# Altium PCB PCB1.PcbDoc
Units mm, origin at the board's own origin, x right, y up, seen from the top; angles counter-clockwise.
Board outline 93.98 x 95.88 mm, 2 copper layers (Top Layer, Bottom Layer); 10 components, 13 nets, 72 pads, 8 vias.
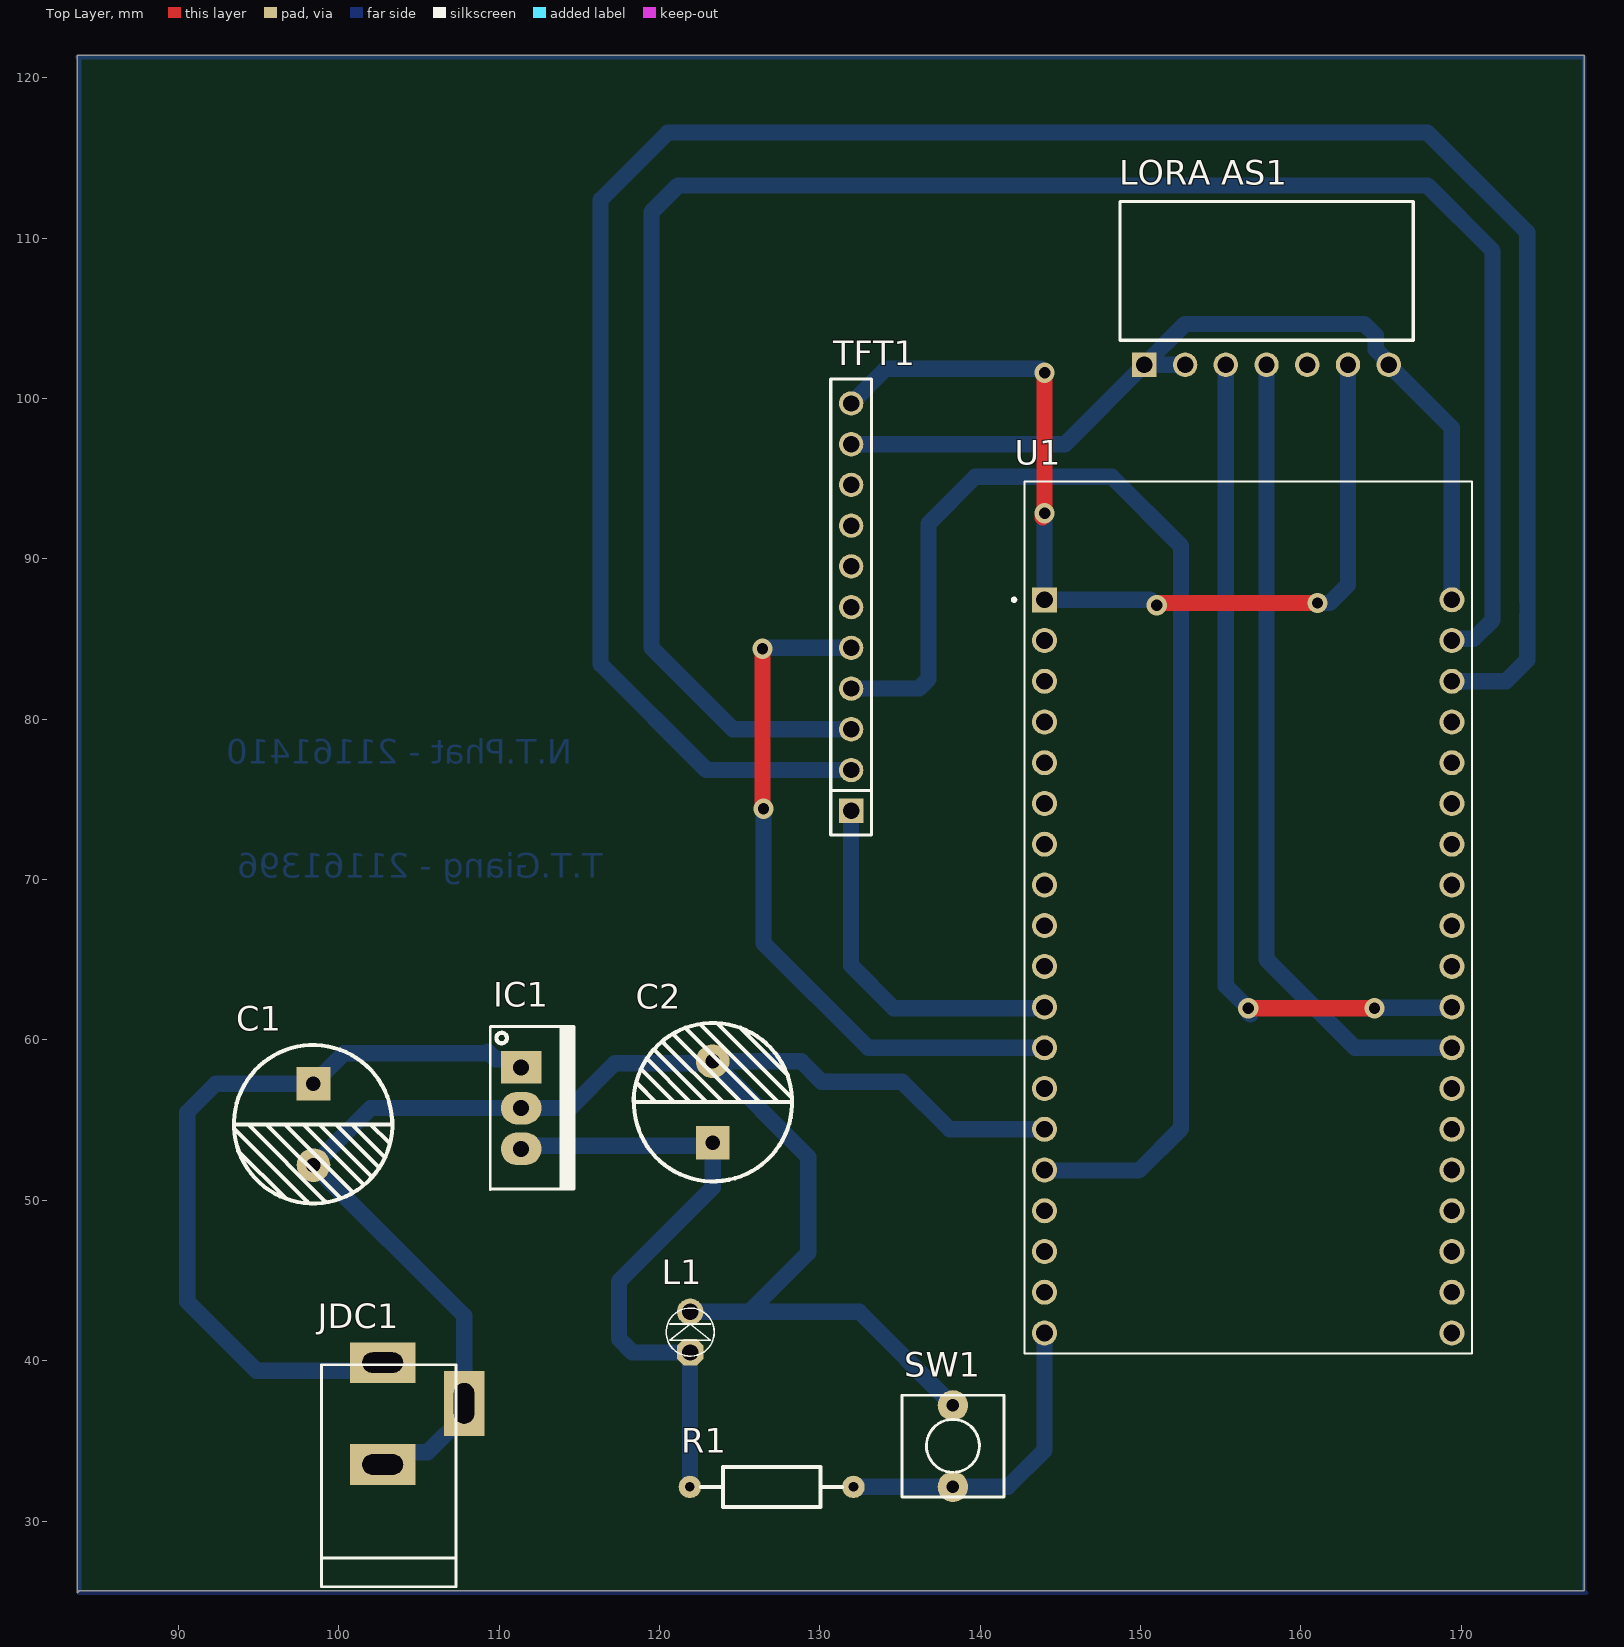
[diagram p0: Top Layer view]
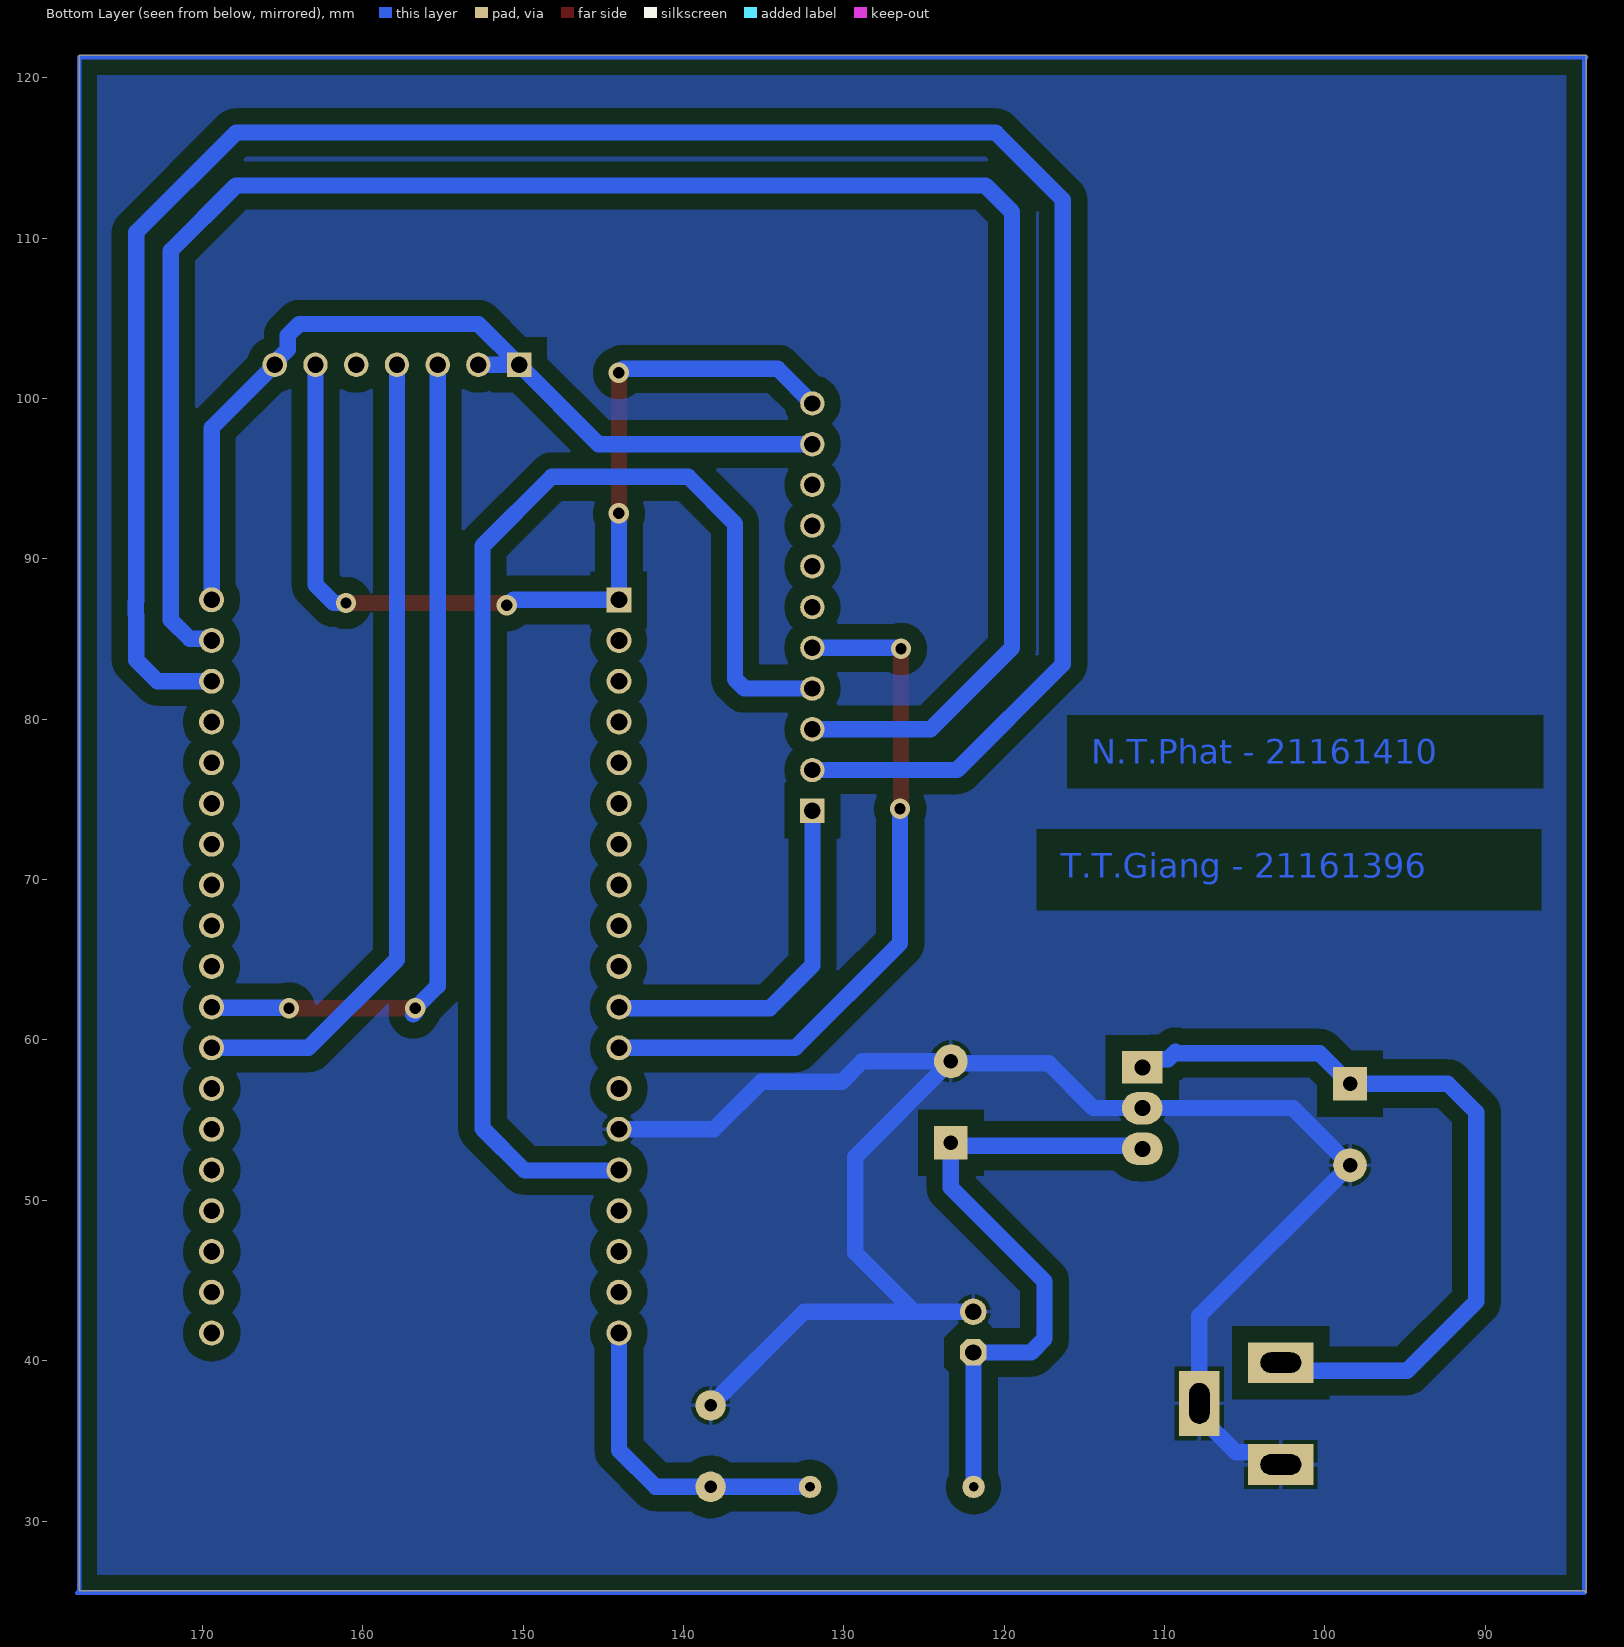
[diagram p1: Bottom Layer view, seen from below]
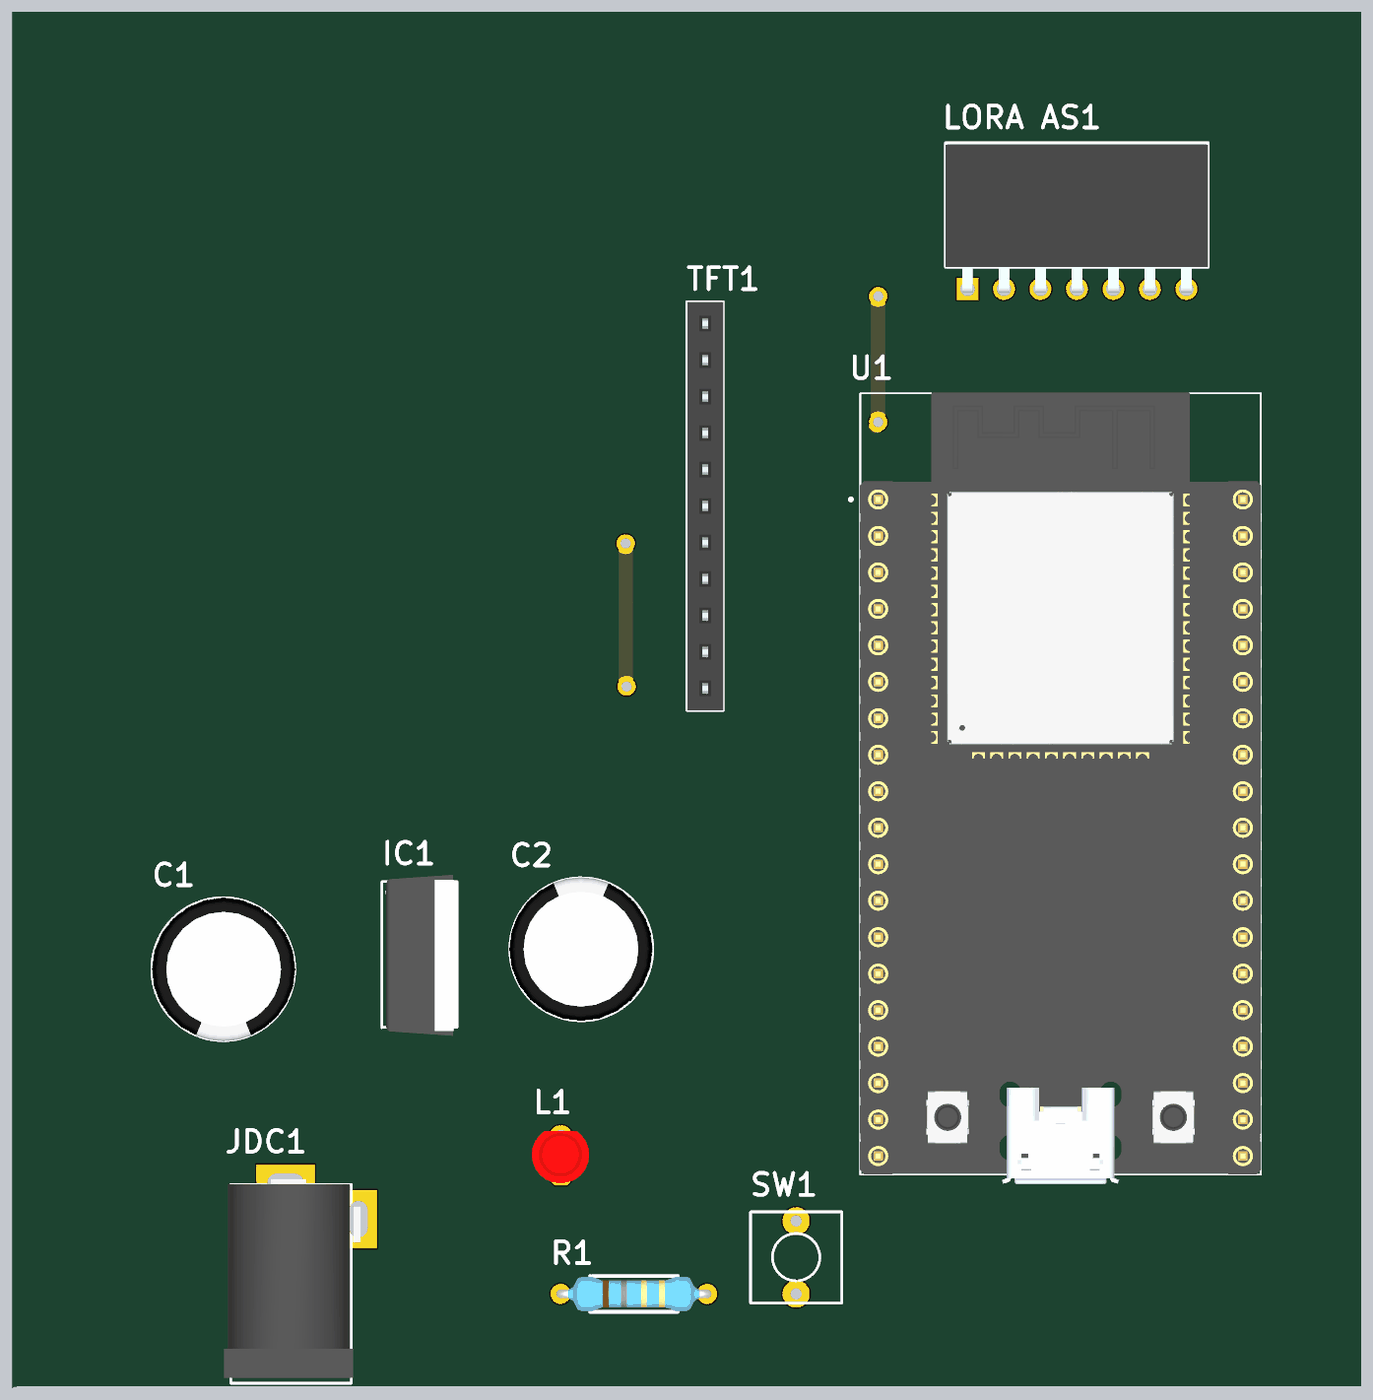
[diagram p2: 3D render of the assembled board from above, using the file's embedded part models]

## Layer stack, top to bottom
Top Solder: solder mask 0.0102, Solder Resist, Dk 3.5
Top Layer: signal copper 0.0356
Dielectric 1: dielectric 0.32, FR-4, Dk 4.8
Bottom Layer: signal copper 0.0356
Bottom Solder: solder mask 0.0102, Solder Resist, Dk 3.5

## Board outline
177.673,121.412 83.693,121.412 83.693,25.527 83.82,25.654 177.673,25.654

## Design rules (kind name [scope] priority, off if disabled: settings)
Clearance [All] p1: gap=1 ignorepadtopadclearanceinfootprint=FALSE
PolygonConnect [All] p1: connectstyle=Relief reliefconductorwidth=0.254 reliefentries=4 polygonreliefangle="90 Angle" airgapwidth=0.254
RoomDefinition Project2 [InComponentClass('Project2')] p1: confinementstyle=ConfineIn formatcopy=TRUE lockcomponents=FALSE outline 0,0 50.8,0 50.8,25.4 0,25.4
RoutingVias [All] p1: holewidth=0.711 width=1.27 viastyle="Through Hole" minholewidth=0.711 minwidth=1.27 maxholewidth=0.711 maxwidth=1.27
SolderMaskExpansion [All] p1: expansion=0.102 istentingtop=FALSE
Width [All] p1: maxlimit=1.016 minlimit=0.762 preferedwidth=1.016
30 further rules are at their usual default settings.

## Components (designator, comment, footprint, x,y, rotation, side; value= is the part's Value field where it differs from the comment)
C1 "100uF" "Tu hoa 10mm" 98.425,54.737 r270 top
C2 "100uF" "Tu hoa 10mm" 123.317,56.134 r90 top
IC1 "LM7805" QTO-220 111.379,58.293 r270 top
JDC1 "Jac DC" DC-IN 105.283,36.703 r90 top
L1 "LED 3mm" LED-3MM-RED 121.92,40.513 r90 top
"LORA AS1" "JP7" JP7-C1C 157.861,102.108 r0 top
R1 "3.9k" "tro vach 1/4w" 127,32.131 r180 top
SW1 "SW" SW2 138.303,37.211 r270 top value="SW chip 2 pin"
TFT1 "JP11" JP11-C1T 131.953,74.295 r90 top
U1 "ESP32-DEVKITC-32D" MODULE_ESP32-DEVKITC-32D 156.718,67.691 r0 top

## Footprints (in the part's own frame and the unit in brackets; to place one, negate y for a bottom-side part, rotate by r counter-clockwise, add the part's x,y. Pads: shape width x height; smd on the part's side, far side on the other; paste and mask are expansions set on the pad)
DC-IN [mil] "Jac DC input"
  rect 100x160 hole 50 slot 100 at 90 deg: 1(125,100) 2(-125,100)
  rect 160x100 hole 50 slot 100 at 0 deg: 3(25,-100)
  silkscreen extent -425,-80 120,250, body extent -410,-105 134,269, height 434
JP7-C1C [mm] "07p 1 row Right angle"
  rect 1.52x1.52 hole 1.02: 1(-7.62,0)
  round 1.52 hole 1.02: 2(-5.08,0) 3(-2.54,0) 4(0,0) 5(2.54,0) 6(5.08,0) 7(7.62,0)
  silkscreen extent -9.14,1.52 9.14,10.17, body extent -9.14,-0.25 9.14,10.05, height 2.51
JP11-C1T [mm] "11 row, straight, gold plating"
  rect 1.52x1.52 hole 1.02: 1(0,0)
  round 1.52 hole 1.02: 2(2.54,0) 3(5.08,0) 4(7.62,0) 5(10.16,0) 6(12.7,0) 7(15.24,0) 8(17.78,0) 9(20.32,0) 10(22.86,0) 11(25.4,0)
  silkscreen extent -1.52,-1.27 26.92,1.27, body extent -1.52,-1.27 26.92,1.23, height 8.51
LED-3MM-RED [mil]
  oct 65x65 hole 40: 1(0,0)
  round 65 hole 40: 2(100,0)
  silkscreen extent -9,-59 109,59, body extent -27,-77 117,80, height 181
MODULE_ESP32-DEVKITC-32D [mm]
  rect 1.56x1.56 / inner round 1.56 / far side rect 1.56x1.56 hole 1.04: J2-1(-12.7,19.76)
  round 1.56 hole 1.04: J2-2(-12.7,17.22) J2-3(-12.7,14.68) J2-4(-12.7,12.14) J2-5(-12.7,9.6) J2-6(-12.7,7.06) J2-7(-12.7,4.52) J2-8(-12.7,1.98) J2-9(-12.7,-0.56) J2-10(-12.7,-3.1) J2-11(-12.7,-5.64) J2-12(-12.7,-8.18) J2-13(-12.7,-10.72) J2-14(-12.7,-13.26) J2-15(-12.7,-15.8) J2-16(-12.7,-18.34) J2-17(-12.7,-20.88) J2-18(-12.7,-23.42) J2-19(-12.7,-25.96) J3-1(12.7,19.76) J3-2(12.7,17.22) J3-3(12.7,14.68) J3-4(12.7,12.14) J3-5(12.7,9.6) J3-6(12.7,7.06) J3-7(12.7,4.52) J3-8(12.7,1.98) J3-9(12.7,-0.56) J3-10(12.7,-3.1) J3-11(12.7,-5.64) J3-12(12.7,-8.18) J3-13(12.7,-10.72) J3-14(12.7,-13.26) J3-15(12.7,-15.8) J3-16(12.7,-18.34) J3-17(12.7,-20.88) J3-18(12.7,-23.42) J3-19(12.7,-25.96)
  silkscreen extent -14.7,-27.25 13.95,27.15, body extent -13.97,-27.9 13.97,27.2, height 6.69
QTO-220 [mil] "TO-220 - 1-2-3"
  rect 80x100 hole 39: 1(0,0)
  oval 80x100 hole 39: 2(100,0) 3(200,0)
  silkscreen extent -100,-76 300,130, body extent -119,-64 322,121, height 755
SW2 [mil] "SW button 2pin, 250x 250 mil"
  round 75 hole 31: 1(0,0) 2(200,0)
  silkscreen extent -25,-125 225,125
"tro vach 1/4w" [mm]
  round 1.4 hole 0.6: 1(-5.1,0) 2(5.1,0)
  silkscreen extent -4.39,-1.25 4.42,1.25, body extent -5.38,-1.2 5.38,1.2, height 2.41
"Tu hoa 10mm" [mm]
  rect 2.1x2.1 hole 0.9: 1(-2.54,0)
  round 2.1 hole 0.9: 2(2.54,0)
  silkscreen extent -4.95,-4.96 4.93,4.92, body extent -5,-5 4.97,5, height 20.01

## Part data
C1 C2: library part "Tu Hoa 100uF 100V 10x20", "Cắm", Chung_Loai=Cắm, Don_Vi=Con, Ma_Hang=MH003150, So_Chan=2, Ten_Linh_Kien="Tụ Hóa 100uF 100V 10x20MM"
IC1: library part LM78xx, "On ap +, from + 5 to + 24VDC"
JDC1: library part DCIN, "Jac DC input"
L1: library part "LED 3mm Do", "Cắm", Chung_Loai=Cắm, Don_Vi=Con, Ma_Hang=MH003892, Ten_Linh_Kien="Led 3MM Phủ Đỏ (10c)"
"LORA AS1": "WR-PHD 2.54 mm Angled Socket Header", Manufacturer="W¨¹rth Elektronik eiSos GmbH", partNo=613007143121, ComponentLink1 Description=Manufacturer, ComponentLink1URL=http://www.we-online.com, ComponentLink2 Description=Datasheet, ComponentLink2URL=http://katalog.we-online.de/em/datasheet/6130xx143121.pdf, Created by="Karrer Zheng", Created Date="29 March 2013", NoPins=07
R1: library part "Tro Vach 1/4W 5% 9.1k", "Cắm", Chung_Loai=Cắm, Don_Vi=Con, Ma_Hang=MH008787, So_Chan=2, Ten_Linh_Kien="Trở Vạch 1/4w 5% 9.1k"
SW1: library part SW2, "Switch button 2 pin"
TFT1: "WR-PHD 2.54 mm Angled Socket Header", Manufacturer="W¨¹rth Elektronik eiSos GmbH", partNo=613011143121, ComponentLink1 Description=Manufacturer, ComponentLink1URL=http://www.we-online.com, ComponentLink2 Description=Datasheet, ComponentLink2URL=http://katalog.we-online.de/em/datasheet/6130xx143121.pdf, Created by="Karrer Zheng", Created Date="29 March 2013", NoPins=11
U1: "WiFi Development Tools (802.11) ESP32 General Development Kit, ESP32-WROOM-32D on the board", Package=None, Check_prices=https://www.snapeda.com/parts/ESP32-DEVKITC-32D/Espressif+Systems/view-part/?ref=eda, MF="Espressif Systems", MP=ESP32-DEVKITC-32D, SnapEDA_Link=https://www.snapeda.com/parts/ESP32-DEVKITC-32D/Espressif+Systems/view-part/?ref=snap

## Via types
v1: diameter 1.27, hole 0.711, Top Layer to Bottom Layer, 8 vias

## Nets (pads, with @x,y where several pads share a name; then routed paths per layer and width w, separated by ;. In a path a pad name is that pad's centre, name@x,y a point inside that pad or via, vN(x,y) a via of type N, cw(c..) or ccw(c..) an arc to the next point about the centre after c; other vN are vias at no path point)
+5: C2.1 IC1.3 L1.1 R1.2 | length 39.9
  Bottom Layer w1.016: IC1.3 111.569,53.404 123.126,53.404 C2.1 123.317,50.8 117.475,44.958 117.475,41.362 118.324,40.513 L1.1 121.91,40.503 121.91,32.141 R1.2
GND: C1.2 C2.2 IC1.2 JDC1.2 JDC1.3 L1.2 SW1.1 U1.J2-14 | length 114.3
  Bottom Layer w1.016: JDC1.2 103.505,34.29 105.537,34.29 107.823,36.576 JDC1.3 107.823,42.799 C1.2 101.981,55.753 IC1.2 114.427,55.753 117.221,58.547 123.19,58.547 C2.2 ; L1.2 125.603,43.053 ; SW1.1 132.461,43.053 125.603,43.053 ; U1.J2-14 138.101,54.431 135.128,57.404 130.108,57.404 128.838,58.674 C2.2 ; C2.2 129.286,52.705 129.286,46.736 125.603,43.053
NetC1_1: C1.1 IC1.1 JDC1.1 | length 48.8
  Bottom Layer w1.016: JDC1.1 102.235,39.37 94.869,39.37 90.551,43.688 90.551,55.499 92.329,57.277 C1.1 100.33,59.182 109.22,59.182 109.307,59.269 109.775,58.801 110.871,58.801 IC1.1
"NetLORA AS1_1": "LORA AS1.1" "LORA AS1.2" "LORA AS1.7" TFT1.10 U1.J3-1 | length 57.1
  Bottom Layer w1.016: TFT1.10 145.288,97.155 150.241,102.108 ; 152.781,102.108 150.241,102.108 ; U1.J3-1 169.418,98.171 165.481,102.108 165.481,102.244 164.666,103.059 164.666,103.939 163.957,104.648 152.781,104.648 150.241,102.108
"NetLORA AS1_3": "LORA AS1.3" U1.J3-11 | length 53.9
  Top Layer w1.016: v1(156.718,61.976) v1(164.592,61.976)
  Bottom Layer w1.016: 155.321,102.108 155.321,63.373 v1(156.718,61.976) 156.718,61.722 v1@156.845,61.595 ; v1(164.592,61.976) 164.63,62.014 169.38,62.014 U1.J3-11
"NetLORA AS1_4": "LORA AS1.4" U1.J3-12 | length 50.9
  Bottom Layer w1.016: 157.861,102.108 157.861,65.024 163.374,59.511 U1.J3-12
"NetLORA AS1_6": "LORA AS1.6" TFT1.11 U1.J2-1 | length 60.2
  Top Layer w1.016: v1@143.891,92.583 144.018,92.71 v1(144.018,92.837) v1(144.018,101.6) ; v1@151.257,87.249 v1(161.036,87.249)
  Bottom Layer w1.016: TFT1.11 134.112,101.854 v1@143.764,101.854 ; v1(144.018,92.837) U1.J2-1 150.605,87.451 150.934,87.122 v1(151.003,87.122) ; v1(161.036,87.249) 161.798,87.249 162.941,88.392 162.941,102.108
NetR1_1: R1.1 SW1.2 U1.J2-19 | length 20.3
  Bottom Layer w1.016: R1.1@132.163,32.194 R1.1 SW1.2 141.732,32.131 144.018,34.417 U1.J2-19
NetTFT1_1: TFT1.1 U1.J2-11 | length 22.9
  Bottom Layer w1.016: TFT1.1 131.953,64.643 134.62,61.976 143.943,61.976 U1.J2-11
NetTFT1_2: TFT1.2 U1.J3-3 | length 141.3
  Bottom Layer w1.016: TFT1.2 122.936,76.835 116.332,83.439 116.332,112.395 120.523,116.586 167.894,116.586 174.117,110.363 174.117,87.376 174.141,87.352 174.141,86.511 174.117,86.487 174.117,83.693 172.795,82.371 U1.J3-3
NetTFT1_3: TFT1.3 U1.J3-2 | length 122.6
  Bottom Layer w1.016: TFT1.3 124.587,79.375 119.507,84.455 119.507,111.633 121.158,113.284 167.894,113.284 171.958,109.22 171.958,86.193 170.78,85.015 169.522,85.015 U1.J3-2
NetTFT1_4: TFT1.4 U1.J2-15 | length 79.4
  Bottom Layer w1.016: TFT1.4 136.184,81.915 136.779,82.51 136.779,92.202 139.7,95.123 148.209,95.123 152.527,90.805 152.527,54.483 149.9,51.856 144.053,51.856 U1.J2-15
NetTFT1_5: TFT1.5 U1.J2-12 | length 44.2
  Top Layer w1.016: v1(126.428,84.391) 126.428,74.486 v1(126.492,74.422)
  Bottom Layer w1.016: v1@126.365,84.328 v1(126.428,84.391) 126.492,84.455 TFT1.5 ; v1(126.492,74.422) 126.492,66.04 133.021,59.511 U1.J2-12
pads on no net: "LORA AS1.5" TFT1.6 TFT1.7 TFT1.8 TFT1.9 U1.J2-2 U1.J2-3 U1.J2-4 U1.J2-5 U1.J2-6 U1.J2-7 U1.J2-8 U1.J2-9 U1.J2-10 U1.J2-13 U1.J2-16 U1.J2-17 U1.J2-18 U1.J3-4 U1.J3-5 U1.J3-6 U1.J3-7 U1.J3-8 U1.J3-9 U1.J3-10 U1.J3-13 U1.J3-14 U1.J3-15 U1.J3-16 U1.J3-17 U1.J3-18 U1.J3-19
copper on no net: | length 379.6
  Bottom Layer w0.254: 83.693,121.285 83.82,121.158 83.82,25.527 177.8,25.527 177.673,25.654 177.673,121.285 83.693,121.285

## Polygon pours and split planes (outlines as drawn)
GND on Bottom Layer "GND_L02_P000" (solid, pour order 0): 83.82,121.158 83.82,25.527 177.546,25.527 177.673,25.654 177.673,121.285 83.947,121.285

## Other copper
Bottom Layer:
  text "N.T.Phat - 21161410" at 114.554,77.216 h1.52
  text "T.T.Giang - 21161396" at 116.459,70.104 h1.52